# Altium PCB PCB1.PcbDoc
Units mil, origin at the board's own origin, x right, y up, seen from the top; angles counter-clockwise.
Board outline 1611 x 963 mil, 2 copper layers (Top Layer, Bottom Layer); 84 components, 50 nets, 248 pads, 88 vias.
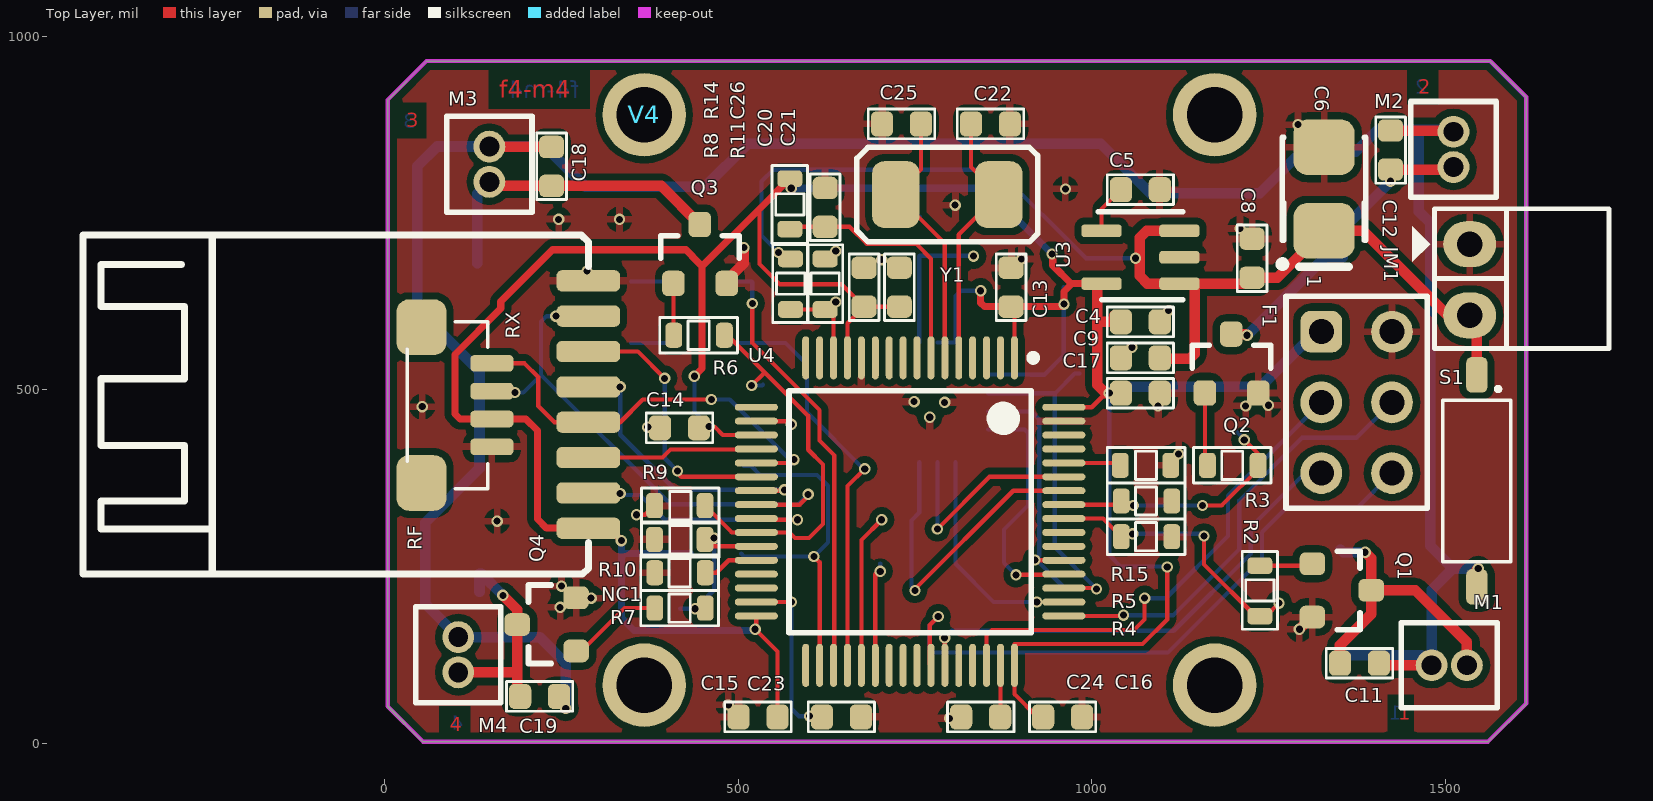
[diagram p0: Top Layer view]
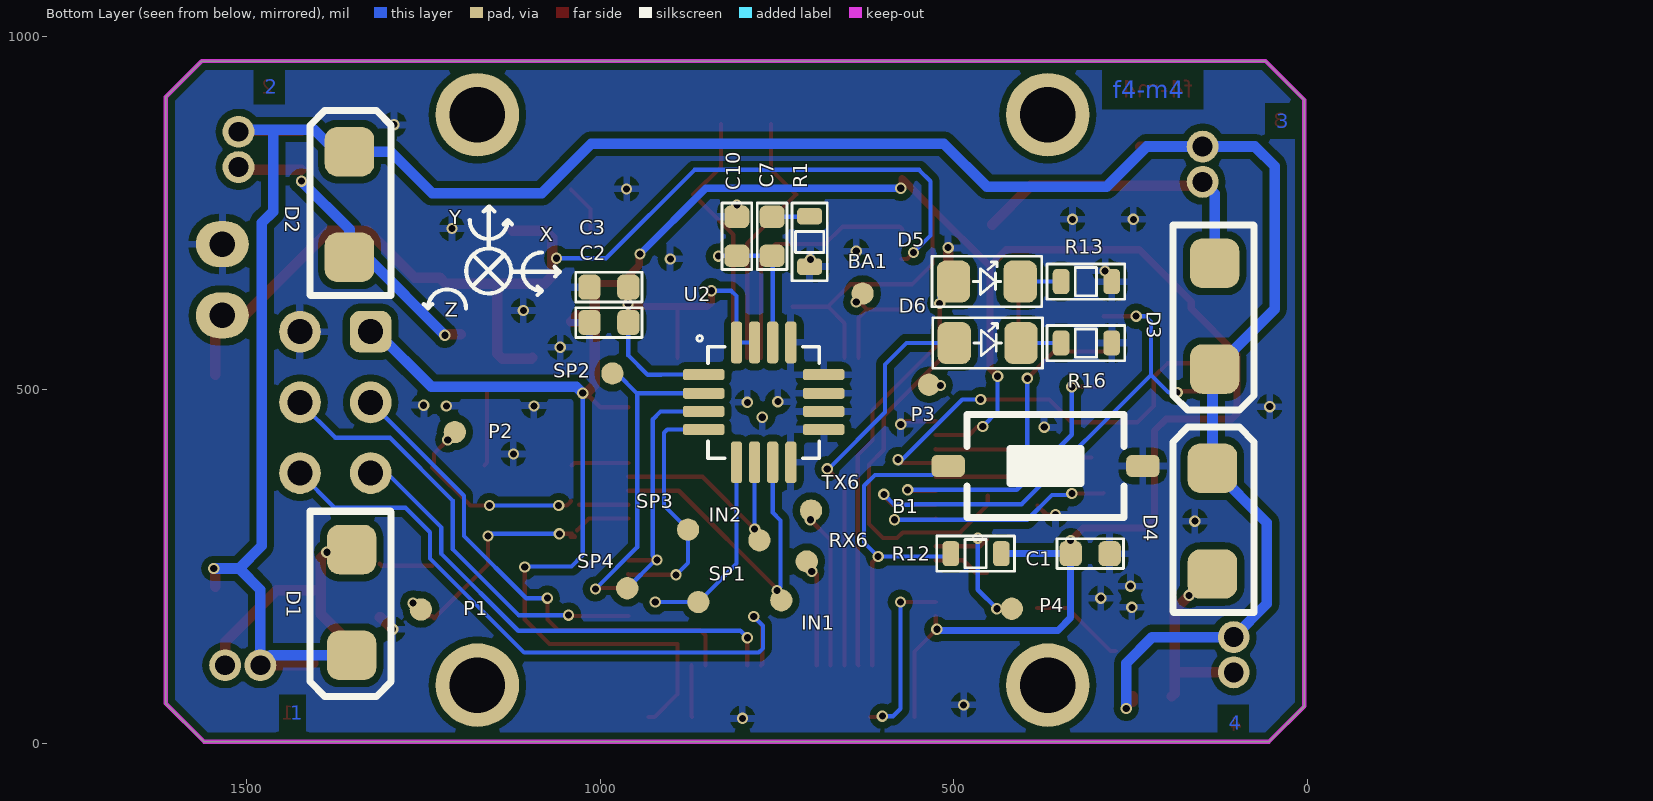
[diagram p1: Bottom Layer view, seen from below]
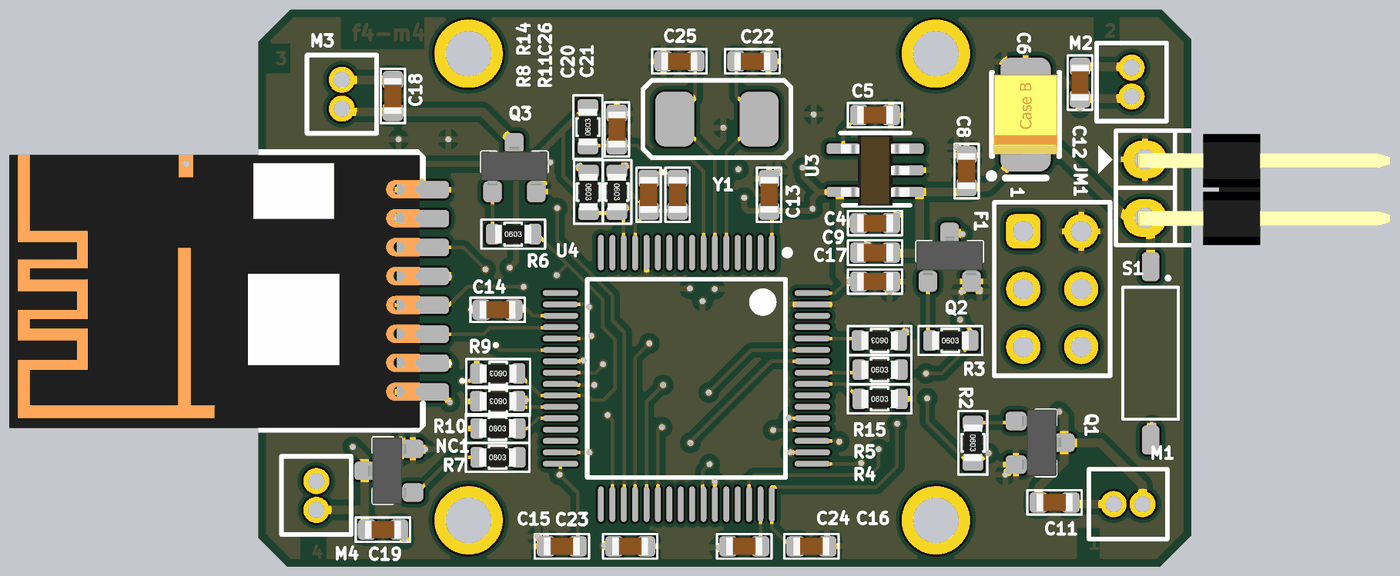
[diagram p2: 3D render of the assembled board from above, using the file's embedded part models]
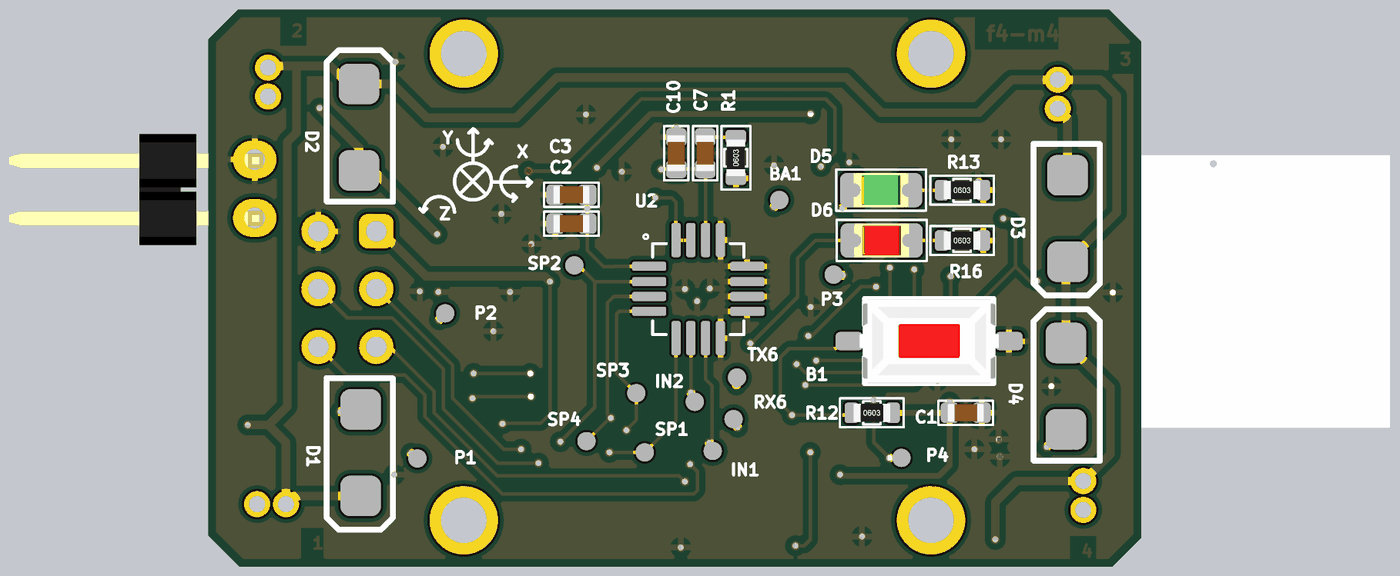
[diagram p3: 3D render of the assembled board from below, using the file's embedded part models]

## Layer stack, top to bottom
Top Solder: solder mask 0.4, Solder Resist, Dk 3.5
Top Layer: signal copper 1.4
Dielectric 1: dielectric 12.6, FR-4, Dk 4.8
Bottom Layer: signal copper 1.4
Bottom Solder: solder mask 0.4, Solder Resist, Dk 3.5

## Board outline
4,52 54,2 1561,2 1615,56 1615,914 1564,965 59,965 4,910

## Design rules (kind name [scope] priority, off if disabled: settings)
Clearance [All] p1: gap=10 ignorepadtopadclearanceinfootprint=TRUE except(0: Arc-Hole Track-Hole SMDPad-Hole THPad-Hole Via-Hole Fill-Hole Poly-Hole Region-Hole Text-Hole)
HoleSize [All] p1: absolutevalues=TRUE maxlimit=100 minlimit=10 maxpercent=80.000 minpercent=20.000
MinimumSolderMaskSliver [All] p1: minsoldermaskwidth=0
PolygonConnect [All] p1: connectstyle=Relief reliefconductorwidth=10 reliefentries=4 polygonreliefangle="90 Angle" airgapwidth=10
RoutingVias [All] p1: holewidth=10 width=16 viastyle="Through Hole" minholewidth=10 minwidth=16 maxholewidth=10 maxwidth=16
SilkToSilkClearance [All] p1: silktosilkclearance=0
SilkToSolderMaskClearance [IsPad] p1: minsilkscreentomaskgap=0 clearancetoexposedcopper=TRUE
SolderMaskExpansion [All] p1: expansion=4
Width [All] p1: maxlimit=50 minlimit=6 preferedwidth=6
26 further rules are at their usual default settings.

## Components (designator, comment, footprint, x,y, rotation, side; value= is the part's Value field where it differs from the comment)
B1 "SW-SMD" SW-SMD 370.2,392 r180 bottom
BA1 "CON1" TEST-POINT 629,636 r180 bottom
C1 "Cap" Cap-0603 307,268 r0 bottom value=0.1u
C2 "Cap" Cap-0603 988,595 r180 bottom value=10u
C3 "Cap" Cap-0603 988,645 r180 bottom value=104
C4 "Cap" Cap-0603 1069,596 r180 top value=1uF
C5 "Cap" Cap-0603 1069,783 r180 top value=22nF
C6 "Cap" SMT_C_Tantalum_B 1329,784 r90 top value=10u
C7 "Cap" Cap-0603 757,717 r270 bottom value=470n
C8 "Cap" Cap-0603 1227,686 r90 top value=104
C9 "Cap" Cap-0603 1069,545 r180 top value=1uF
C10 "Cap" Cap-0603 807,717 r270 bottom value=10n
C11 "Cap" Cap-0603 1379,113 r0 top value=104
C12 "Cap" Cap-0603 1423,839 r90 top value=104
C13 "Cap" Cap-0603 886,645 r270 top value=4.7u
C14 "Cap" Cap-0603 417,446 r0 top value=104
C15 "Cap" Cap-0603 528,37 r0 top value=104
C16 "Cap" Cap-0603 959,37 r180 top value=104
C17 "Cap" Cap-0603 1069,495 r180 top value=104
C18 "Cap" Cap-0603 236,816 r90 top value=104
C19 "Cap" Cap-0603 219,66 r0 top value=104
C20 "Cap" Cap-0603 678,645 r270 top value=1u
C21 "Cap" Cap-0603 728,645 r270 top value=104
C22 "Cap" Cap-0603 857,876 r180 top value=20p
C23 "Cap" Cap-0603 646,37 r180 top value=2.2u
C24 "Cap" Cap-0603 843,37 r0 top value=2.2u
C25 "Cap" Cap-0603 731,876 r0 top value=20p
C26 "Cap" Cap-0603 623,758 r270 top value=104
D1 "SCHO" SMA 1352,199 r90 bottom
D2 "SCHO" SMA 1355,762 r270 bottom
D3 "SCHO" SMA 131,604 r90 bottom
D4 "SCHO" SMA 134,314 r270 bottom
D5 "PW" LED_SMD_0805_GREEN 453.2,653 r180 bottom
D6 "PW" LED_SMD_0805_RED 452.2,566 r180 bottom
F1 "Header 3X2" HDR2X3 1325,582 r270 top locked
IN1 "CON1" TEST-POINT 744,202 r90 bottom
IN2 "CON1" TEST-POINT 775,287 r90 bottom
JM1 "BAT" jp2h 1535,706 r270 top value="Connector 2"
M1 "JP2" "Con2 - 1.27MM" 1506,110 r0 top value="Connector 2"
M2 "JP2" "Con2 - 1.27MM" 1512,840 r270 top value="Connector 2"
M3 "JP2" "Con2 - 1.27MM" 148,819 r270 top value="Connector 2"
M4 "JP2" "Con2 - 1.27MM" 104,125 r270 top value="Connector 2"
NC1 "Resistor" RES-SMD-0603 417,241 r0 top value=10k
P1 "CON1" TEST-POINT 1254,189 r180 bottom
P2 "CON1" TEST-POINT 1206,440 r90 bottom
P3 "CON1" TEST-POINT 535,507 r180 bottom
P4 "CON1" TEST-POINT 418,190 r180 bottom
Q1 "Si2302DS" SOT23-3 1354,216 r270 top
Q2 "Si2302DS" SOT23-3 1198,537 r0 top
Q3 "Si2302DS" SOT23-3 446,692 r0 top
Q4 "Si2302DS" SOT23-3 229,168 r90 top
R1 "10k-1%" RES-SMD-0603 704,709 r90 bottom
R2 "Resistor" RES-SMD-0603 1238,216 r270 top value=100R
R3 "Resistor" RES-SMD-0603 1199,393 r0 top value=100R
R4 "Resistor" RES-SMD-0603 1077,292 r0 top value=10k
R5 "Resistor" RES-SMD-0603 1077,342.5 r0 top value=10k
R6 "Resistor" RES-SMD-0603 444,577 r0 top value=100R
R7 "Resistor" RES-SMD-0603 417,191 r0 top value=100R
R8 "Resistor" RES-SMD-0603 574,650 r270 top value=100K
R9 "Resistor" RES-SMD-0603 418,336 r180 top value=10k
R10 "Resistor" RES-SMD-0603 418,288 r180 top value=10k
R11 "Resistor" RES-SMD-0603 623,650 r270 top value=100K
R12 "Resistor" RES-SMD-0603 469.2,268 r180 bottom value=10k
R13 "Resistor" RES-SMD-0603 313.2,653 r180 bottom value=1k
R14 "Resistor" RES-SMD-0603 573,762.11 r90 top value=10k
R15 "Resistor" RES-SMD-0603 1077,393 r180 top value=10k
R16 "Resistor" RES-SMD-0603 313.2,566 r180 bottom value=1k
RF "nRF24l01" NRF-E01 287.33,302.9 r90 top locked
RX "CON4" SH4-1MM 151.41,478.24 r90 top locked
RX6 "CON1" TEST-POINT 708,257 r180 bottom
S1 "SW SPST" SW1-SMD 1545,371 r180 top
SP1 "CON1" TEST-POINT 861.43,199.57 r180 bottom
SP2 "CON1" TEST-POINT 983,523 r90 bottom
SP3 "CON1" TEST-POINT 876,302 r90 bottom
SP4 "CON1" TEST-POINT 962,219 r90 bottom
TX6 "CON1" TEST-POINT 702,329 r180 bottom
U2 "L3G4200D" *PQFN65P400X400X110N 769,482 r180 bottom locked
U3 "RT9193" RT9193 1124.24,651.97 r180 top
U4 "STM32F405RGT6" STM-LQFP64_L 743.16,327.52 r270 top locked
V1 "1" vit-2mm#1 52.51,25.9 r0 top
V2 "1" vit-2mm#2 15.51,609.9 r90 top
V3 "1" vit-2mm#3 624.51,628.9 r90 top
V4 "1" vit-2mm#4 679.51,48.9 r90 top
Y1 "8MHz" CRY_SMD_5032 723,776 r0 top

## Footprints (in the part's own frame and the unit in brackets; to place one, negate y for a bottom-side part, rotate by r counter-clockwise, add the part's x,y. Pads: shape width x height; smd on the part's side, far side on the other; paste and mask are expansions set on the pad)
*PQFN65P400X400X110N [mm]
  rrect50% 1.5x0.4 smd: 1(-2.155,1) 2(-2.155,0.325) 3(-2.155,-0.325) 4(-2.155,-0.975) 9(2.155,-0.975) 10(2.155,-0.325) 11(2.155,0.325) 12(2.155,1)
  rrect50% 0.4x1.5 smd: 5(-0.975,-2.155) 6(-0.325,-2.155) 7(0.325,-2.155) 8(0.975,-2.155) 13(0.975,2.155) 14(0.325,2.155) 15(-0.325,2.155) 16(-0.975,2.155)
  silkscreen extent -2.4,-2 2,2.4
Cap-0603 [mm] "Chip Capacitor, Body 1.6x0.8mm, IPC High Density"
  rrect50% 0.8x0.9 smd mask+0.1: 1(-0.7,0) 2(0.7,0)
  silkscreen extent -1.19,-0.53 1.19,0.53, body extent -0.8,-0.4 0.8,0.4, height 0.6
"Con2 - 1.27MM" [mil]
  round 45 hole 27.95: 1(-25,0) 2(25,0)
  silkscreen extent -68,-60 68,60
CRY_SMD_5032 [mm]
  rrect50% 1.7x2.4 smd: 1(0,0) 2(3.7,0)
  silkscreen extent -1.4,-1.7 5.1,1.7
HDR2X3 [mm] "Connector; Header; 3x2 Position"
  rrect50% 1.5x1.5 hole 0.9: 1(0,0)
  round 1.5 hole 0.9: 2(0,2.54) 3(2.54,0) 4(2.54,2.54) 5(5.08,0) 6(5.08,2.54)
  silkscreen extent -1.27,-1.27 6.35,3.81, body extent -1.27,-1.27 6.35,3.81, height 7
jp2h [mil]
  oval 65x75 hole 36: 1(0,0) 2(101,0)
  silkscreen extent -50,-81 148,197, body extent -44,-14 148,424, height 99
LED_SMD_0805_GREEN [mm] "Chip Resistor, Body 2.0x1.3mm, IPC High Density"
  rrect50% 1.2x1.5 smd: 1(-1.2,0) 2(1.2,0)
  silkscreen extent -1.97,-0.9 1.97,0.91, body extent -1.2,-0.75 1.2,0.75, height 0.9
LED_SMD_0805_RED [mm] "Chip Resistor, Body 2.0x1.3mm, IPC High Density"
  rrect50% 1.2x1.5 smd: 1(-1.2,0) 2(1.2,0)
  silkscreen extent -1.97,-0.9 1.97,0.91, body extent -1.2,-0.75 1.2,0.75, height 0.9
NRF-E01 [mil]
  rrect50% 30x90 smd: 1(1.1,-0.67) 2(51.1,-0.67) 3(101.1,-0.67) 4(151.1,-0.67) 5(201.1,-0.67) 6(251.1,-0.67) 7(301.1,-0.67) 8(351.1,-0.67)
  silkscreen extent -64,-1 416,714, body extent -61,5 411,714, height 31
RES-SMD-0603 [mm]
  rrect50% 0.6x0.9 smd: 1(-0.889,0) 2(0.927,0)
  silkscreen extent -1.4,-0.64 1.4,0.64, body extent -0.8,-0.4 0.8,0.4, height 0.43
RT9193 [mm]
  rrect50% 1.45x0.45 smd: 1(0,0.05) 2(0,-0.9) 3(0,-1.85) 4(2.8,-1.85) 5(2.8,0.05)
  silkscreen extent -0.13,-2.54 2.92,0.63, body extent -0.1,-2.44 2.9,0.66, height 1.1
SH4-1MM [mm]
  rrect50% 0.6x1.55 smd: 1(-1.5,0) 2(-0.5,0) 3(0.5,0) 4(1.5,0)
  rrect50% 2x1.8 smd: Z1(-2.8,2.525) Z2(2.8,2.525)
  silkscreen extent -3,0.15 3,3.05
SMA [mil]
  rrect50% 70x70 smd: 1(74.8,0) 2(-74.8,0)
  silkscreen extent -133,-56 129,59
SMT_C_Tantalum_B [mm]
  rrect50% 2x2.2 smd: 1(-1.5,0) 2(1.5,0)
  silkscreen extent -2.82,-1.5 1.85,1.62, body extent -1.75,-1.4 1.75,1.4, height 1.9
SOT23-3 [mil]
  rrect50% 32x36 smd: 1(-37.7,-41.69) 2(37.7,-41.69) 3(-0.3,41.68)
  silkscreen extent -55,-6 56,26, body extent -58,-47 57,51, height 26
STM-LQFP64_L [mm] "Thin QFP, 64-Leads, Body 10x10mm, Pitch 0.5mm, IPC High Density"
  oval 1.55x0.25 smd: 1(-5.525,3.75) 2(-5.525,3.25) 3(-5.525,2.75) 4(-5.525,2.25) 5(-5.525,1.75) 6(-5.525,1.25) 7(-5.525,0.75) 8(-5.525,0.25) 9(-5.525,-0.25) 10(-5.525,-0.75) 11(-5.525,-1.25) 12(-5.525,-1.75) 13(-5.525,-2.25) 14(-5.525,-2.75) 15(-5.525,-3.25) 16(-5.525,-3.75) 33(5.525,-3.75) 34(5.525,-3.25) 35(5.525,-2.75) 36(5.525,-2.25) 37(5.525,-1.75) 38(5.525,-1.25) 39(5.525,-0.75) 40(5.525,-0.25) 41(5.525,0.25) 42(5.525,0.75) 43(5.525,1.25) 44(5.525,1.75) 45(5.525,2.25) 46(5.525,2.75) 47(5.525,3.25) 48(5.525,3.75)
  oval 0.25x1.55 smd: 17(-3.75,-5.525) 18(-3.25,-5.525) 19(-2.75,-5.525) 20(-2.25,-5.525) 21(-1.75,-5.525) 22(-1.25,-5.525) 23(-0.75,-5.525) 24(-0.25,-5.525) 25(0.25,-5.525) 26(0.75,-5.525) 27(1.25,-5.525) 28(1.75,-5.525) 29(2.25,-5.525) 30(2.75,-5.525) 31(3.25,-5.525) 32(3.75,-5.525) 49(3.75,5.525) 50(3.25,5.525) 51(2.75,5.525) 52(2.25,5.525) 53(1.75,5.525) 54(1.25,5.525) 55(0.75,5.525) 56(0.25,5.525) 57(-0.25,5.525) 58(-0.75,5.525) 59(-1.25,5.525) 60(-1.75,5.525) 61(-2.25,5.525) 62(-2.75,5.525) 63(-3.25,5.525) 64(-3.75,5.525)
  silkscreen extent -5.65,-4.35 4.35,4.55, body extent -5,-5 5,5, height 1.6
SW1-SMD [mm]
  rrect50% 0.76x1.27 smd: 1(0,-3.81) 2(0,3.81)
  silkscreen extent -1.22,-3.35 1.22,2.9
SW-SMD [mm] "Switch SMD type"
  rrect50% 1.2x0.8 smd: 1(-3.5,0) 2(3.5,0)
  silkscreen extent -2.82,-1.85 2.82,1.85, body extent -3.05,-1.85 3.05,1.85, height 2.5
TEST-POINT [mm]
  round 0.8 smd: 1(0,0)
vit-2mm#1 [mm] "VIT"
  round 3 hole 2: VIT1(7.986,1.425)
vit-2mm#2 [mm] "VIT"
  round 3 hole 2: VIT1(7.091,-29.426)
vit-2mm#3 [mm] "VIT"
  round 3 hole 2: VIT1(-13.891,-13.957)
vit-2mm#4 [mm] "VIT"
  round 3 hole 2: VIT1(21.341,7.94)

## Part data
B1: "Switch", LatestRevisionDate=17-Jul-2002, LatestRevisionNote="Re-released for DXP Platform.", PackageReference=SPST-2, Published=24-Mar-1999, Publisher="Altium Limited"
BA1 IN1 IN2 P1 P2 P3 P4 RX RX6 SP1 SP2 SP3 SP4 TX6: "Connector"
C1 C2 C3 C4 C5 C7 C8 C9 C10 C11 C12 C13 C14 C15 C16 C17 C18 C19 C20 C21 C22 C23 C24 C25 C26: "Capacitor"
  C1 C2 C3 C4 C5 C7 C9 C10 C11 C12 C13 C14 C15 C16 C17 C18 C19 C20 C21 C22 C23 C24 C25 C26: LatestRevisionDate=17-Jul-2002, LatestRevisionNote="Re-released for DXP Platform.", PackageReference=RAD-0.3, Published=8-Jun-2000, Publisher="Altium Limited"
C6: library part "Cap Pol"
D1 D2 D3 D4: library part "DIODE SCHOTTKY", "Schottky Diode"
D5 D6: library part LED, "Typical INFRARED GaAs LED", LatestRevisionDate=08-Jul-2005, LatestRevisionNote="Mech Layer 1 removed.", PackageReference=LED-0, Published=8-Jun-2000, Publisher="Altium Limited"
F1: "Header, 3-Pin, Dual row", LatestRevisionDate=17-Jul-2002, LatestRevisionNote="Re-released for DXP Platform.", Publisher="Altium Limited"
JM1 M1 M2 M3 M4: library part CON2, "Connector 2"
NC1 R2 R3 R4 R5 R6 R7 R8 R9 R10 R11 R12 R13 R14 R15 R16: "Semiconductor Resistor", LatestRevisionDate=17-Jul-2002, LatestRevisionNote="Re-released for DXP Platform.", PackageReference=AXIAL-0.5, Published=8-Jun-2000, Publisher="Altium Limited"
Q1 Q2 Q3 Q4: "N-Channel MOSFET", LatestRevisionDate=17-Jul-2002, LatestRevisionNote="Re-released for DXP Platform.", PackageDescription="TO, Flat Index; 3 In-Line, Axial Leads; Body Dia. 4.6mm; Lead Dia. 0.5 mm (max)", PackageReference=E3, PackageVersion=1995/1996, Published=8-Jun-2000, Publisher="Altium Limited"
R1: library part Res, "Resistor 1/4W"
RF: library part nRF24, "nRF24", LatestRevisionDate=17-Jul-2002, LatestRevisionNote="Re-released for DXP Platform.", Publisher="Altium Limited"
U2: "Gyroscope X _Pitch_, Y _Roll_, Z _Yaw_ ±250, 500, 2000 100Hz ~ 800Hz I²C, SPI 16-LGA _4x4_", Package="TFLGA-16 STMicroelectronics", Availability=Unavailable, MF=STMicroelectronics, MP=L3G4200D, Price=None, SnapEDA_Link=https://www.snapeda.com/parts/L3G4200D/STMicroelectronics/view-part/237126/?ref=snap
U4: "ARM Cortex-M4 32-bit MCU+FPU, 210 DMIPS, 1024 kB Flash, 192 kB Internal RAM, 51 I/Os, 64-pin LQFP, -40 to 85 degC, Tray", I/Os (High Current)=51, Manufacturer=STMicroelectronics, Operating Frequency(F) (Processor speed) (MHz)=168, Supplier Part Number 1=497-11767-ND, Supply Voltage(Vcc) max (V)=3.6, Supply Voltage(Vcc) min (V)=1.8, ComponentLink1Description="Manufacturer URL", ComponentLink1URL=http://www.st.com/web/en/home.html, ComponentLink2Description=Datasheet, ComponentLink2URL=http://www.st.com/st-web-ui/static/active/en/resource/technical/document/datasheet/DM00037051.pdf, ComponentLink3Description="Package Specification", ComponentLink3URL=http://www.st.com/st-web-ui/static/active/en/resource/technical/document/datasheet/DM00037051.pdf, Core="ARM Cortex-M4", D/A Converter=2x12-bit, DatasheetVersion="Rev. 4", FLASH Size (Prog) (kB)=1024, Internal RAM Size (kB)=192, Mounting Technology="Surface Mount", PackageDescription="64-Pin Low Profile Quad Flat Package, 10 x 10 mm Body, 0.5 mm Pitch", PackageReference=LQFP64, PackageVersion="Rev. 4, 06/2013", Packing=Tray, PartNumber=STM32F405RGT6, Supplier 1=Digi-Key, Supplier 2=Farnell, Supplier 3=Newark, Supplier 4=Mouser, Supplier Part Number 2=2064363, Supplier Part Number 3=73T2329, Supplier Part Number 4=511-STM32F405RGT6
V1 V2 V3 V4: library part VIT, "Oc Vit"
Y1: library part Crystal, "Crystal Oscillator", LatestRevisionDate=17-Jul-2002, LatestRevisionNote="Re-released for DXP Platform.", PackageReference=R38, Published=8-Jun-2000, Publisher="Altium Limited"

## Via types
v1: diameter 16, hole 10, Top Layer to Bottom Layer, tented both sides, 88 vias

## Nets (pads, with @x,y where several pads share a name; then routed paths per layer and width w, separated by ;. In a path a pad name is that pad's centre, name@x,y a point inside that pad or via, vN(x,y) a via of type N, cw(c..) or ccw(c..) an arc to the next point about the centre after c; other vN are vias at no path point)
BAT_F4: BA1.1 R8.2 R11.2 U4.14 | length 141.7
  Top Layer w6: R8.2 R11.2 ; U4.14 634.89,601.63 R11.2 ; v1(638,624) 633.49,624 R11.2
BOO0_F4: R15.2 U4.60 | length 81.2
  Top Layer w6: U4.60 1037.09,396.42 R15.2
BOO1_F4: NC1.2 U4.28 | length 79.4
  Top Layer w6: NC1.2 469,241 486.62,258.62 U4.28
BUT2_F4: B1.1 R12.1 U4.34 | length 500.7
  Top Layer w6: v1(607,264) 615.2,255.8 U4.34
  Bottom Layer w6: R12.1 508.21,264 v1(607,264) 627,284 627,364 611.64,379.36 531,379.36 518.36,392 B1.1
CE_RF: RF.2 U4.25 | length 370.8
  Top Layer w6: RF.2 289,353 v1(333,353) ; U4.25 527.31,316 v1(584,316)
  Bottom Layer w6: v1(333,353) 335,351 361,351 396,316 v1(584,316)
CS1_F4: RF.3 U4.20 | length 226.1
  Top Layer w6: RF.3@305,404 393,404 404.28,415.28 525.64,415.28 U4.20
CS3_F4: SP1.1 U2.5 U4.50 | length 280.9
  Bottom Layer w6: U2.5 807.39,253.61 SP1.1 v1(922.36,199.57)
GND: B1.2 C1.1 C2.1 C3.1 C4.1 C5.1 C6.2 C8.2 C9.2 C10.1 C13.1 C14.1 C15.1 C16.1 C17.1 C20.1 C21.1 C22.1 C23.1 C24.1 C25.1 C26.1 F1.2 JM1.1 NC1.1 Q1.2 Q2.2 Q3.2 Q4.2 R1.1 R4.2 R5.2 R9.2 R10.2 R11.1 R13.2 R15.1 R16.2 RF.8 RX.1 U2.8 U2.9 U2.10 U2.11 U2.12 U2.13 U3.2 U4.12 U4.18 U4.63 | length 168.3
  Top Layer w6: v1(356,323) 368.52,323 R9.2 ; U4.18 570.53,455.47 v1(575,451)
  Top Layer w15: Q3.2 483.7,654.7 508,679 v1(508,701) ; v1(1294,161) 1311.3,178.3 Q1.2
  other v1: 799,35 486,54 248,192 292,205 250,222 159,314 1123,409 372,447 771,461 53,476 1094,477 1218,477 1250,478 792,482 749,483 1057,560 1109,612 286,668 703,684 901,685 638,696 1210,728 246,741 332,741 807,761 963,784 1292,875
IBUS: RF.7 RX.3 U4.24 | length 768.3
  Top Layer w6: RX.3 182.08,497.92 v1(184,496) ; v1(242,604) RF.7 ; U4.24 587.09,337.36 v1@601.72,352
  Bottom Layer w6: v1(184,496) 196,496 221,521 ; v1(242,604) 229,604 221,596 221,521 ; v1(599,352) 584.36,337.36 556.57,337.36 555.94,338 404,338 221,521
INT1_F4: IN1.1 U2.7 U4.58 | length 458.1
  Top Layer w6: v1(750,216) 750,218 889.05,357.05 U4.58
  Bottom Layer w6: v1(750,216) 745,221 745,315 756.2,326.2 U2.7
INT2_F4: IN2.1 U2.6 U4.59 | length 303.6
  Top Layer w6: v1(781.8,303) 855.53,376.73 U4.59
  Bottom Layer w6: v1(781.8,303) U2.6
LED1_F4: D5.1 U4.35 | length 610.5
  Top Layer w6: v1(520,622) 520,566 615,471 615,428 636,407 636,111.11 U4.35
  Bottom Layer w6: D5.1 519,653 520,652 v1(520,622)
LED2_F4: D6.1 U4.36 | length 581
  Top Layer w6: U4.36 654.57,363.57 v1(679,388)
  Bottom Layer w6: D6.1 567,566 597.45,535.55 597.45,468 677.45,388 v1(679,388)
M1: P1.1 R2.2 R4.1 U4.56 | length 393.8
  Top Layer w6: U4.56 1016.32,317.68 R4.1@1033,301 ; R4.1 1036,292 1040,296 v1(1058,296) ; v1(1159,293) 1159,252.51 R2.2@1235,176.51 ; R2.2 1246.51,179.51 v1(1265,198)
  Bottom Layer w6: v1(1058,296) 1156,296 v1(1159,293)
M2: P2.1 R3.2 R5.1 U4.57 | length 350.6
  Top Layer w6: U4.57 1030,337.36 ; R5.1 1041.5,342 1047.5,336 v1(1059,336) ; v1(1157,336) 1184,336 R3.2@1238,390 ; v1(1216,429) 1235.49,409.51 R3.2
  Bottom Layer w6: v1(1059,336) v1(1157,336) ; P2.1 1216,430 v1(1216,429)
M3: P3.1 R6.2 R9.1 U4.26 | length 574.6
  Top Layer w6: R9.1@452,340 R9.1@452,350 ; R9.1 491.01,297.99 U4.26 572.31,297.99 580.3,290 600,290 620,310 620,394 599,415 599,463 538,524 ; R6.2 485,577 538,524 ; v1(519,506) 537,524 538,524
  Bottom Layer w6: v1(519,506) 534,506 P3.1
M4: P4.1 R7.2 R10.1 U4.27 | length 222.7
  Top Layer w6: v1(466,290) 464,288 R10.1 462.7,278.31 U4.27
  Bottom Layer w6: P4.1 v1(439,190) 466,217 v1(466,290)
MISO1_F4: RF.6 U4.22 | length 379
  Top Layer w6: RF.6 358,554 v1(396,516) ; v1(414,385) 414,382 419.27,376.73 U4.22
  Bottom Layer w6: v1(396,516) 396,403 v1(414,385)
MISO3_F4: SP3.1 U2.4 U4.52 | length 348.3
  Top Layer w6: v1(893,238) 959.74,238 U4.52
  Bottom Layer w6: U2.4 905.39,443.61 910,439 910,336 SP3.1 876,255 v1(893,238)
MOSI1_F4: RF.5 U4.23 | length 417.4
  Top Layer w6: RF.5 v1(333,504) ; U4.23 563.96,357.05 v1(565.27,358.36)
  Bottom Layer w6: v1(333,504) 333,436.3 410.94,358.36 v1(565.27,358.36)
MOSI3_F4: SP4.1 U2.3 U4.53 | length 377.5
  Top Layer w6: v1@920,258.62 U4.53
  Bottom Layer w6: U2.3 914.8,469.2 926,458 926,265 v1(920,259) 922,259 SP4.1
NetC5_2: C5.2 U3.4 | length 69.6
  Top Layer w6: U3.4 1014,755.56 C5.2
NetC7_1: C7.1 R1.2 | length 53.4
  Bottom Layer w6: R1.2 704.94,744.56 C7.1
NetC7_2: C7.2 C10.2 U2.14 | length 199.1
  Bottom Layer w6: U2.14 756.2,688.64 C7.2 C10.2 832.56,689.44 v1(833,689)
NetC11_1: C11.1 D1.1 M1.2 Q1.3 | length 414.2
  Top Layer w15: C11.1 1351.44,138.44 1395.68,182.68 Q1.3 ; v1(1387,270) 1395.68,261.32 Q1.3 ; M1.2 1531,143 1457.7,216.3 Q1.3
  Bottom Layer w15: D1.1 1355.8,270 v1(1387,270)
NetC12_1: C12.1 D2.1 M2.2 Q2.3 | length 430.1
  Top Layer w15: Q2.3 1218.32,578.68 v1(1220,577) ; C12.1 1508.44,811.44 M2.2
  Bottom Layer w15: v1(1220,577) 1330.2,687.2 D2.1 1355,727 v1(1423,795)
NetC18_1: C18.1 D3.1 M3.2 Q3.3 | length 444.9
  Top Layer w15: M3.2 153.56,788.44 C18.1 390.94,788.44 Q3.3
  Bottom Layer w15: D3.1 131,777 M3.2
NetC19_1: C19.1 D4.1 M4.2 Q4.3 | length 307.6
  Top Layer w15: M4.2 186.32,100 187.32,101 ; v1(167,209) 187.32,188.68 Q4.3 187.32,101 ; C19.1 187.32,70.13 187.32,101
  Bottom Layer w15: D4.1@134,214 D4.1 136.8,239.2 v1(167,209)
NetD5_2: D5.2 R13.1 | length 57.8
  Bottom Layer w6: R13.1 D5.2
NetD6_2: D6.2 R16.1 | length 56.8
  Bottom Layer w6: R16.1 D6.2
NetQ1_1: Q1.1 R2.1 | length 75.4
  Top Layer w6: R2.1 1309.62,251 Q1.1
NetQ2_1: Q2.1 R3.1 | length 103.8
  Top Layer w6: Q2.1 1160.3,396.7 R3.1
NetQ3_1: Q3.1 R6.1 | length 73.6
  Top Layer w6: Q3.1 408.3,577.7 R6.1
NetQ4_1: Q4.1 R7.1 | length 136.5
  Top Layer w6: Q4.1 278.3,130.3 339,191 R7.1
OSC0_F4: C22.2 U4.5 Y1.2 | length 370.7
  Top Layer w6: U4.5 812,545.09 812,719.33 Y1.2 829.44,815.23 C22.2
OSC1_F4: C25.2 U4.6 Y1.1 | length 374.4
  Top Layer w6: C25.2 758.56,811.56 Y1.1 792.37,706.63 U4.6
PPM: RF.4 RX.4 U4.21 | length 598.8
  Top Layer w6: RX.4 197.71,537.29 217,518 217,477 240,454 RF.4 333,454 365,486 v1(462,486) ; U4.21 578.58,396.42 579,396.83 v1(579,401)
  Bottom Layer w6: v1(462,486) 488,486 578,396 579,397 v1(579,401)
RST_F4: C26.2 R14.1 U4.7 | length 360
  Top Layer w6: R14.1 576.34,730.44 C26.2 657.56,730.44 682,706 752,706 772.69,685.31 U4.7
RX1_F4: F1.5 U4.43 | length 691.9
  Top Layer w6: v1(792,149) 792.37,148.63 U4.43
  Bottom Layer w6: v1(792,149) 802,159 1116.25,159 1225,267.75 1225,305 1302,382 F1.5 F1.5@1324,381
RX6: RX6.1 U4.38 | length 148.7
  Top Layer w6: U4.38 693.94,238.94 698,243 v1(701,243)
  Bottom Layer w6: v1(701,243) RX6.1@701,254
SCK3_F4: SP2.1 U2.2 U4.51 | length 488.9
  Top Layer w6: U4.51 1005.75,219.25 v1(1007,218)
  Bottom Layer w6: U2.2 948,494.8 ; SP2.1 976.2,523 948,494.8 ; v1(1007,218) 948,277 948,494.8
SWCLK_F4: F1.4 U4.49 | length 629.9
  Top Layer w6: U4.49 1043.88,179.88 v1(1045,181)
  Bottom Layer w6: v1(1045,181) 1115.63,181 1209,274.37 1209,343.37 1297.63,432 1375,432 F1.4
SWDIO_F4: F1.3 U4.46 | length 703.5
  Top Layer w6: U4.46 851.43,152.43 859,160 1060,160 1075,175 v1(1075,205)
  Bottom Layer w6: v1(1075,205) 1105,205 1193,293 1193,350 F1.3
TX1_F4: F1.6 U4.42 | length 909.6
  Top Layer w6: U4.42 771,111.69 771,167 v1(783,179)
  Bottom Layer w6: v1(783,179) 770,166 770,134 776,128 1107.88,128 1241,261.12 1241,298.37 1275.63,333 1376,333 F1.6
TX6: TX6.1 U4.37 | length 221.9
  Top Layer w6: U4.37 674.26,287.26 v1(703,316)
  Bottom Layer w6: TX6.1@699,316 v1(703,316)
VBAT: C6.1 C8.1 C9.1 JM1.2 R8.1 S1.1 U3.1 U3.3 | length 1625.5
  Top Layer w6: v1(557,694) 566,685 R8.1
  Top Layer w15: C9.1 1097.56,544 1139,544 1146,551 U3.1@1146,650 ; U3.3 1077.8,724.8 1068,715 1068,661 1079,650 U3.1 U3.1@1146,650 ; S1.1 1545,595 JM1.2 1504,605 1384.05,724.95 C6.1 1262.49,658.44 C8.1 1218.56,650 U3.1@1146,650
  Bottom Layer w6: v1(557,694) 533,718 533,795 549,811 867,811 992,686 v1(1062,686)
VCAP1_F4: C23.2 U4.31 | length 239.2
  Top Layer w6: U4.31 v1(575.43,199.57) ; C23.2@610,37 C23.2
  Bottom Layer w6: v1(575.43,199.57) 575.43,48.57 586,38 v1(601,38)
VCAP2_F4: C24.2 U4.47 | length 73.2
  Top Layer w6: C24.2 871.11,37.55 U4.47
VCC: C1.2 C2.2 C3.2 C4.2 C13.2 C14.2 C15.2 C16.2 C17.2 C20.2 C21.2 F1.1 R12.2 R14.2 RF.1 RX.2 U2.1 U2.15 U2.16 U3.5 U4.1 U4.13 U4.19 U4.32 U4.48 U4.64 | length 4788.5
  Top Layer w6: 467,447 478.21,435.79 U4.19 ; v1(524,161) v1@525.64,159.36 ; U4.32 v1@525.64,159.36 ; 530.2,755.8 530,755.6 530,678 559,649 646.44,649 C20.2 ; C15.2 555.56,129.44 v1@525.64,159.36 ; U4.13 654.57,594.02 C20.2 ; C21.2 C20.2 ; C13.2 890.8,612.65 U4.1 ; C16.2 923,37 890.8,69.2 U4.48 890.8,140 1072,140 1107,175 v1(1107,249) ; U4.64 1000.16,475.16 v1@1020,495
  Top Layer w10: v1(334.56,286.44) 317,304 RF.1 229,304 216,317 216,442 199.45,458.55 RX.2 106.45,458.55 99.17,465.83 99.17,550 164,614.83 164,625 237,698 426,698 435,689 435,688.6 449,674.6 ; v1(438,519) 449,530 449,674.6 ; 530,755.6 449,674.6 ; 530.2,755.8 R14.2 573,787 v1(575,785) ; v1(843,640) 843,623 848.56,617.44 C13.2 957.44,617.44 v1(961,621) 961,639 971.5,649.5 945,676 945,691 v1(944,692) ; 972,650 U3.5
  Top Layer w15: U3.5 1008,644 1008,595 ; v1@1020,495 1008,507 1008,595 ; C4.2@1032.44,605 C4.2 1009,596 1008,595
  Bottom Layer w6: v1(438,519) 438,469 v1(459,448) ; U2.15 U2.16 807.39,632.39 815,640 v1(843,640) ; U2.1 913.37,521.37 913.74,521 933,521 960.44,548.44 C2.2 C3.2 ; v1(1025,495) 1025,266 1041,250 1106,250 v1(1107,249)
  Bottom Layer w10: v1(334.56,286.44) C1.2 C1.2@334.56,263 ; R12.2 339.56,268 C1.2@334.56,263 ; v1(524,161) 522.25,159.25 352.75,159.25 334.56,177.44 C1.2@334.56,263 ; v1(575,785) 851,785 v1(944,692)
  Bottom Layer w15: v1(1025,495) 1034,504 1239,504 1317,582 F1.1
VMOTOR: C11.2 C12.2 C18.2 C19.2 D1.2 D2.2 D3.2 D4.2 M1.1 M2.1 M3.1 M4.1 S1.2 | length 3829.5
  Top Layer w15: M3.1 148.44,843.56 C18.2 ; C19.2@246.56,58.44 C19.2 ; C11.2 1409.56,110 M1.1 ; C12.2 1510.44,866.56 M2.1 ; S1.2 1545,245 v1(1547,247)
  Bottom Layer w15: v1(256,49) 256,113 219,150 M4.1 57,197 57,311.8 D4.2 134,526.2 D3.2 46,614.2 46,816 74,844 M3.1 227,844 284,787 453,787 514,848 1013,848 1083,778 1238,778 1296.8,836.8 D2.2 1373.8,836.8 1405,868 1466,868 ; D1.2 1466.8,124.2 M1.1 1481,217 1511,247 ; M2.1 1509,868 1466,868 ; v1(1547,247) 1511,247 ; 1466,868 1463,865 1463,752 1479,736 1479,279 1511,247
pads on no net: RX.Z1 RX.Z2 U4.2 U4.3 U4.4 U4.8 U4.9 U4.10 U4.11 U4.15 U4.16 U4.17 U4.29 U4.30 U4.33 U4.39 U4.40 U4.41 U4.44 U4.45 U4.54 U4.55 U4.61 U4.62 V1.VIT1 V2.VIT1 V3.VIT1 V4.VIT1

## Polygon pours and split planes (outlines as drawn)
GND on Top Layer "GND PG" (solid, remove dead copper, pour order 4): 15,904 65.5,954.5 1560,955 1605,910 1605,60 1555,10 60,10 15,55
GND on Bottom Layer "BOT GND PG" (solid, remove dead copper, pour order 6): 15,904 65,955 1560,955 1605,910 1605,60 1555,10 60,10 15,55

## Keep-outs
Keep-Out Layer:
  the board outline again, w6

## Other copper
Top Layer:
  text "2" at 1462,919 h20
  text "f4-m4" at 162,913 h25
  text "3" at 30,871 h20
  text "1" at 1434,33 h20
  text "4" at 92,17 h20
Bottom Layer:
  text "2" at 1475,919 h20
  text "f4-m4" at 275,912 h25
  text "3" at 44,870 h20
  text "1" at 1439,33 h20
  text "4" at 111,19 h20

## Silkscreen, mask and mechanical layers (free items; w line width, h text height)
Bottom Overlay:
  circle w6: c1158,668 r31.83
  lines w6: 1064,660 1057,667 ; 1065,674 1058,667 1057,667 ; 1083,694 cw(c1083,667) 1083,640 ; 1089,634 1083,640 ; 1089,646 1083,640 ; 1125,734 1131,740 ; 1126,667 1057,667 ; 1136,646 1179,689 1182,689 ; 1136,691 1180.5,646.5 ; 1137,734 1131,740 ; 1150,752 1157,759 1158,759 ; 1158,700 1158,759 ; 1165,752 1158,759 ; 1185,740 cw(c1158,740) 1131,740 ; 1190,615 cw(c1217,615) 1244,615 ; 1238,621 1244,615 ; 1250,621 1244,615
  text "Y" at 1214,734 h20
  text "X" at 1086,710 h20
  text "Z" at 1220,603 h20

## Text inside footprints (layer, text, board x,y; h text height)
F1: Top Overlay "1" at 1305,662 h20 r270